# Altium PCB Tracking-Car.PcbDoc
Units mm, origin at the board's own origin, x right, y up, seen from the top; angles counter-clockwise.
Board outline 75 x 96.27 mm, 2 copper layers (Top Layer, Bottom Layer); 50 components, 56 nets, 229 pads, 51 vias.
Unrouted connection lines stored in the file: 183.
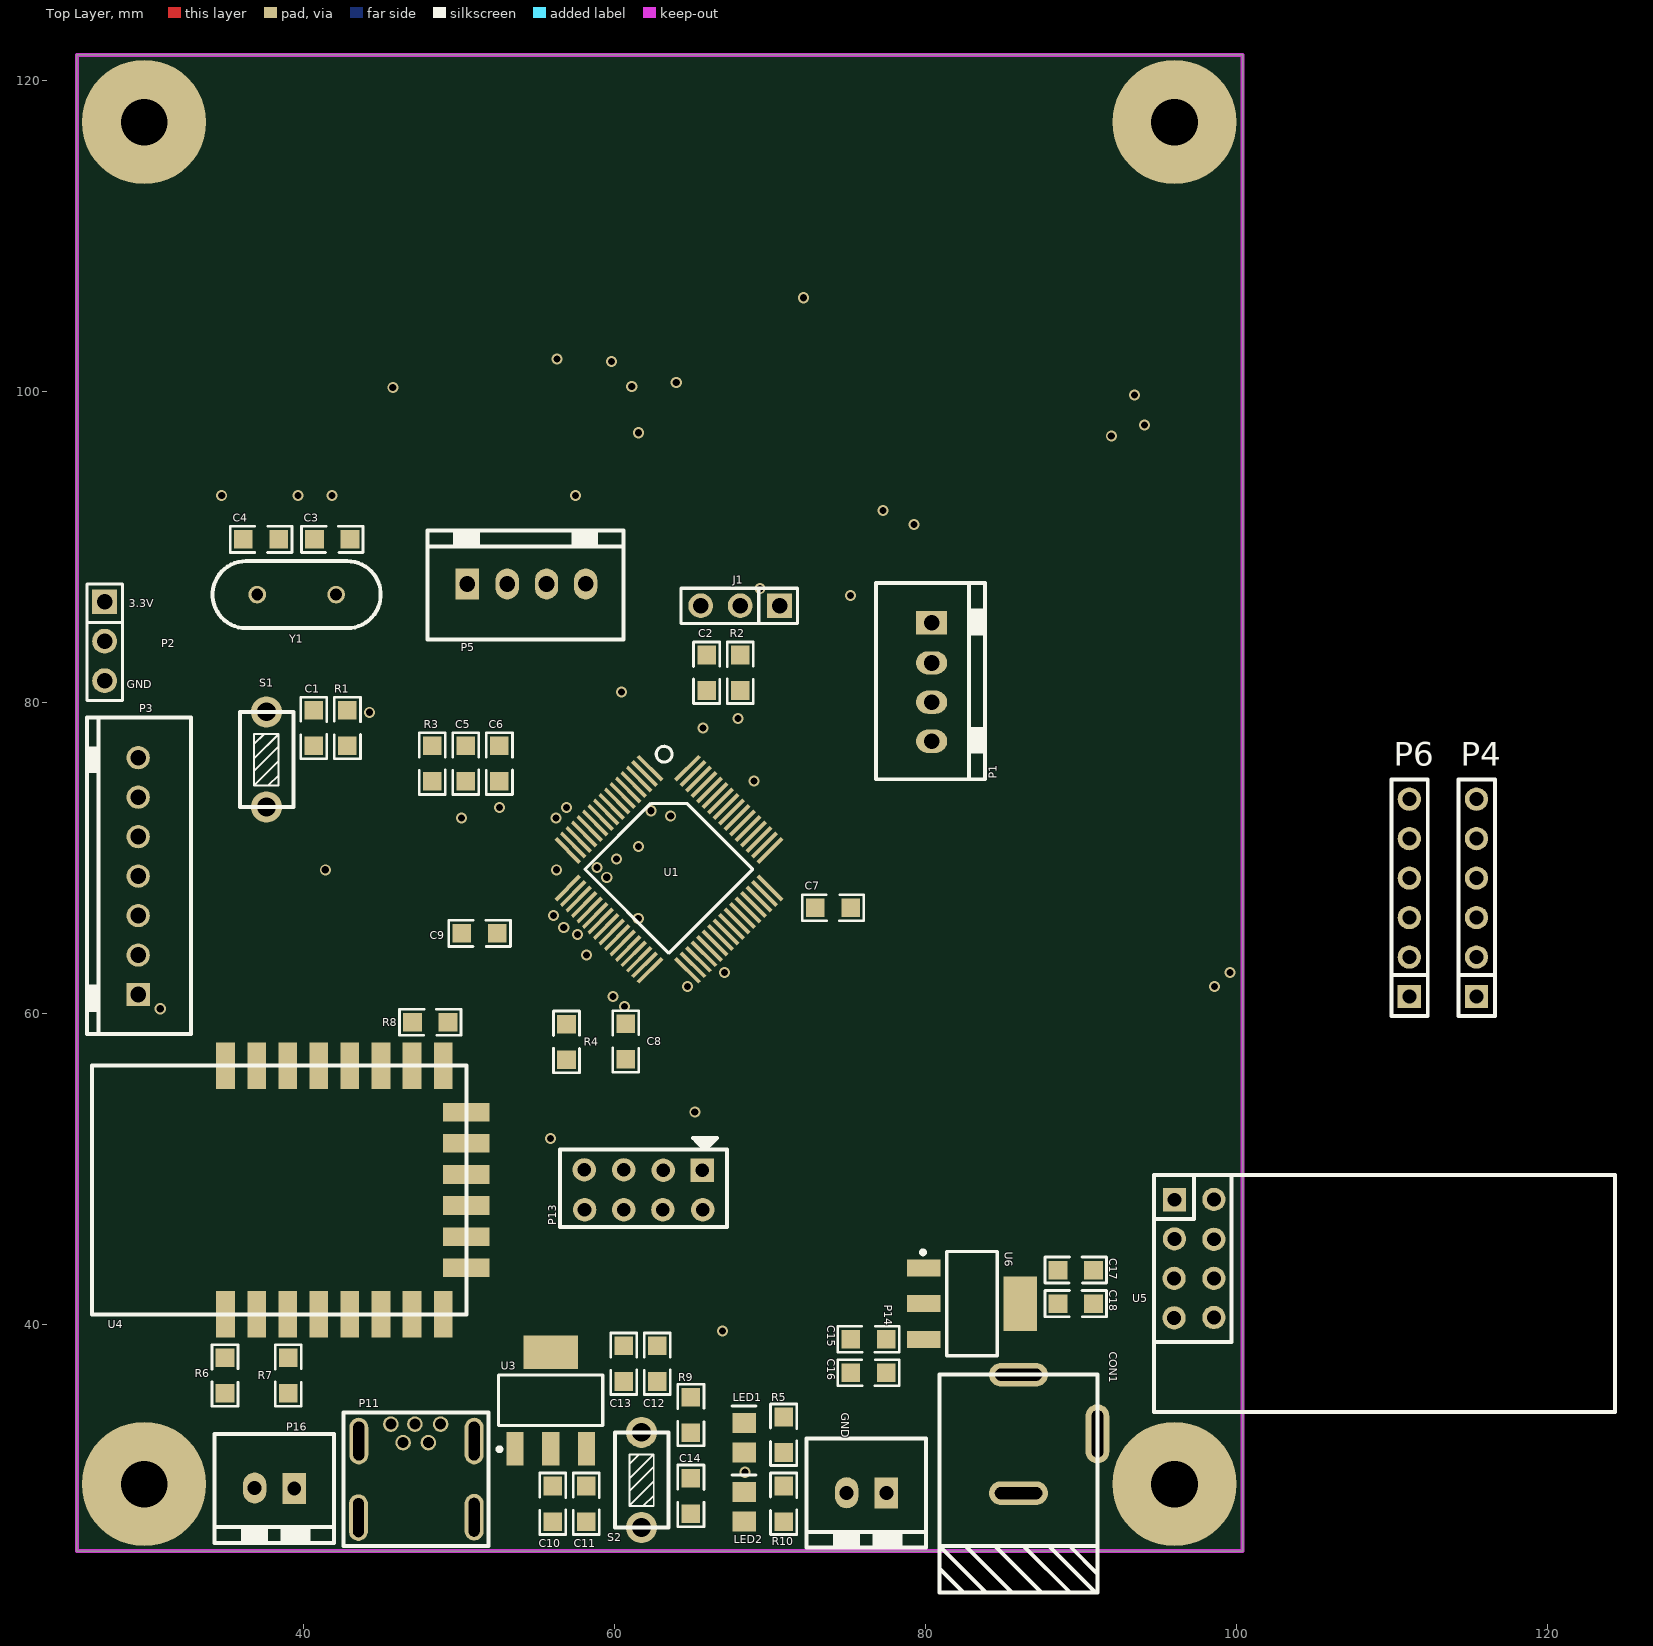
[diagram p0: Top Layer view]
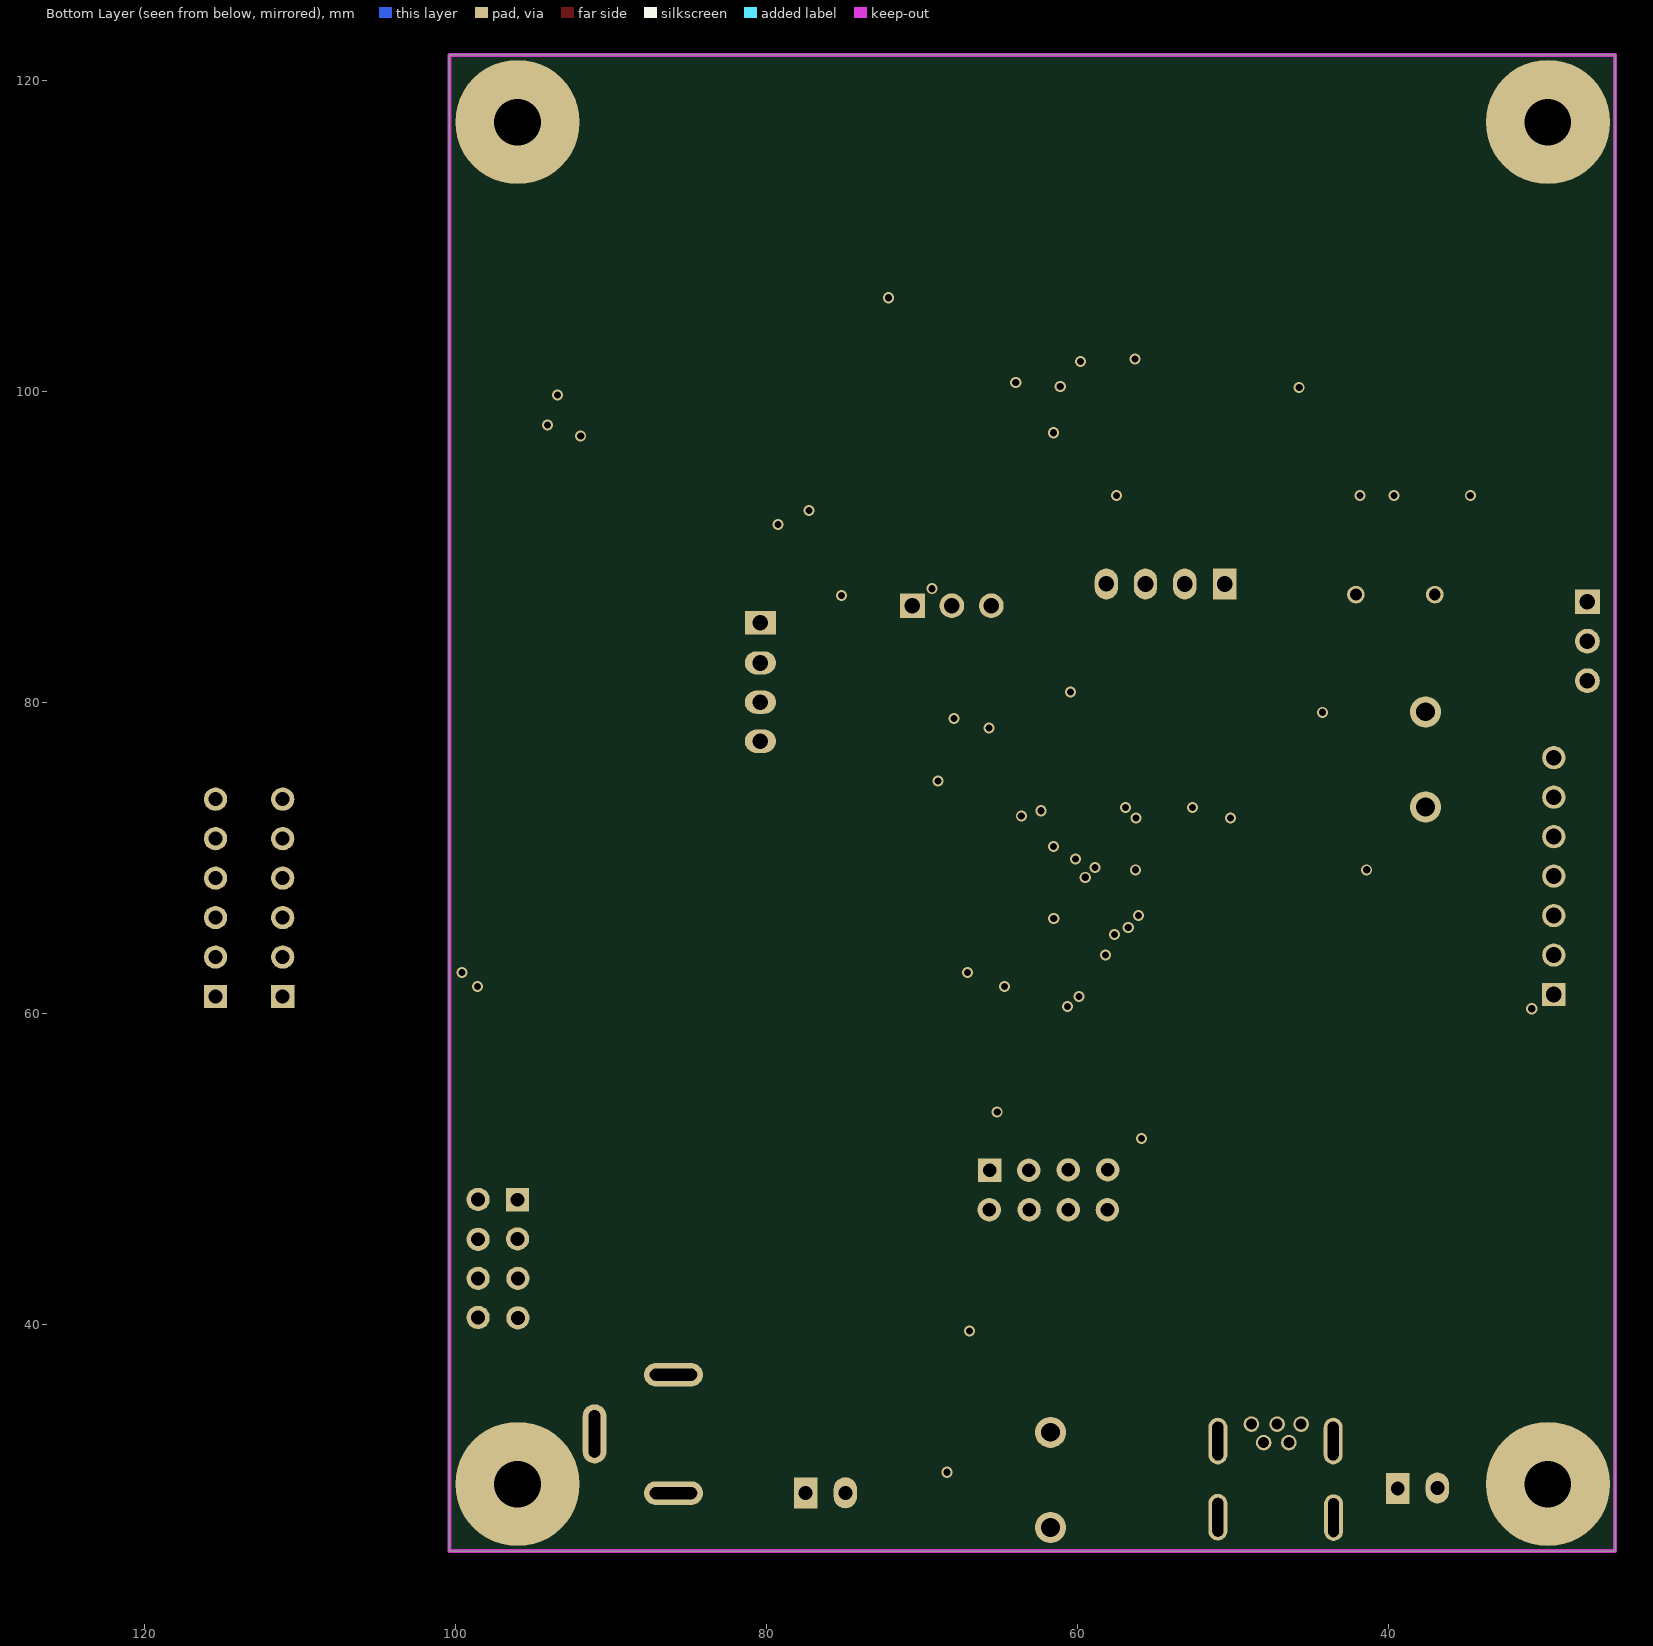
[diagram p1: Bottom Layer view, seen from below]

## Layer stack, top to bottom
Top Solder: solder mask 0.0102, Solder Resist, Dk 3.5
Top Layer: signal copper 0.0356
Dielectric 1: dielectric 0.32, FR-4, Dk 4.8
Bottom Layer: signal copper 0.0356
Bottom Solder: solder mask 0.0102, Solder Resist, Dk 3.5

## Board outline
25.4,25.4 100.4,25.4 100.4,121.666 25.4,121.666

## Design rules (kind name [scope] priority, off if disabled: settings)
AssemblyTestPointUsage [All] p0: scope1count=1 scope1_0_kind=Board scope1_0_value=Board scope2count=1 scope2_0_kind=Board scope2_0_value=Board commentlength=0
AssemblyTestpoint [All] p0: scope1count=1 scope1_0_kind=Board scope1_0_value=Board scope2count=1 scope2_0_kind=Board scope2_0_value=Board commentlength=0
Clearance [All] p0: scope1count=1 scope1_0_kind=Board scope1_0_value=Board scope2count=1 scope2_0_kind=Board scope2_0_value=Board commentlength=0 gap=0.152
Clearance [All] p1: gap=0.152 ignorepadtopadclearanceinfootprint=FALSE
ComponentClearance [All] p0: scope1count=1 scope1_0_kind=Board scope1_0_value=Board scope2count=1 scope2_0_kind=Board scope2_0_value=Board commentlength=0 gap=0.254 collisioncheckmode=3
DiffPairsRouting [All] p0: scope1count=1 scope1_0_kind=Board scope1_0_value=Board scope2count=1 scope2_0_kind=Board scope2_0_value=Board commentlength=0
FabricationTestPointUsage [All] p0: scope1count=1 scope1_0_kind=Board scope1_0_value=Board scope2count=1 scope2_0_kind=Board scope2_0_value=Board commentlength=0 valid=0 allowmultiple=FALSE
FabricationTestpoint [All] p0: scope1count=1 scope1_0_kind=Board scope1_0_value=Board scope2count=1 scope2_0_kind=Board scope2_0_value=Board commentlength=0 side=3 testpointundercomponent=TRUE minsize=1.016 maxsize=2.54 preferedsize=1.524 minholesize=0 maxholesize=1.016 preferedholesize=0.813 testpointgrid=0.025
FanoutControl Fanout_BGA [All] p0 off: scope1count=1 scope1_0_kind=Board scope1_0_value=Board scope2count=1 scope2_0_kind=Board scope2_0_value=Board commentlength=69 // Protel DXP Scope 1 Expression Was: IsBGA   Fanout_BGA (Default Rule)
FanoutControl Fanout_LCC [All] p0 off: scope1count=1 scope1_0_kind=Board scope1_0_value=Board scope2count=1 scope2_0_kind=Board scope2_0_value=Board commentlength=69 // Protel DXP Scope 1 Expression Was: IsLCC   Fanout_LCC (Default Rule)
FanoutControl Fanout_SOIC [All] p0 off: scope1count=1 scope1_0_kind=Board scope1_0_value=Board scope2count=1 scope2_0_kind=Board scope2_0_value=Board commentlength=71 // Protel DXP Scope 1 Expression Was: IsSOIC   Fanout_SOIC (Default Rule)
FanoutControl Fanout_Small [All] p0 off: scope1count=1 scope1_0_kind=Board scope1_0_value=Board scope2count=1 scope2_0_kind=Board scope2_0_value=Board commentlength=84 // Protel DXP Scope 1 Expression Was: (CompPinCount < 5)   Fanout_Small (Default Rule)
FanoutControl Fanout_Default [All] p0: scope1count=1 scope1_0_kind=Board scope1_0_value=Board scope2count=1 scope2_0_kind=Board scope2_0_value=Board commentlength=30 // Fanout_Default (Default Rule)
Height [All] p0: scope1count=1 scope1_0_kind=Board scope1_0_value=Board scope2count=1 scope2_0_kind=Board scope2_0_value=Board commentlength=0
HoleSize [All] p0: scope1count=1 scope1_0_kind=Board scope1_0_value=Board scope2count=1 scope2_0_kind=Board scope2_0_value=Board commentlength=0 absolutevalues=TRUE maxlimit=7.62 minlimit=0.025 maxpercent=80.000 minpercent=20.000
HoleSize [All] p1: absolutevalues=TRUE maxlimit=7.62 minlimit=0.025 maxpercent=80.000 minpercent=20.000
HoleToHoleClearance [All] p0: scope1count=1 scope1_0_kind=Board scope1_0_value=Board scope2count=1 scope2_0_kind=Board scope2_0_value=Board commentlength=0
LayerPairs [All] p0: scope1count=1 scope1_0_kind=Board scope1_0_value=Board scope2count=1 scope2_0_kind=Board scope2_0_value=Board commentlength=0 enforce=TRUE
MinimumSolderMaskSliver [All] p0: scope1count=1 scope1_0_kind=Board scope1_0_value=Board scope2count=1 scope2_0_kind=Board scope2_0_value=Board commentlength=0
NetAntennae [All] p0: scope1count=1 scope1_0_kind=Board scope1_0_value=Board scope2count=1 scope2_0_kind=Board scope2_0_value=Board commentlength=0
PasteMaskExpansion [All] p0: scope1count=1 scope1_0_kind=Board scope1_0_value=Board scope2count=1 scope2_0_kind=Board scope2_0_value=Board commentlength=0 expansion=0
PlaneClearance [All] p0: scope1count=1 scope1_0_kind=Board scope1_0_value=Board scope2count=1 scope2_0_kind=Board scope2_0_value=Board commentlength=0 clearance=0.508
PlaneConnect [All] p0: scope1count=1 scope1_0_kind=Board scope1_0_value=Board scope2count=1 scope2_0_kind=Board scope2_0_value=Board commentlength=0 planeconnectstyle=Relief reliefexpansion=0.508 reliefentries=4 reliefconductorwidth=0.254 reliefairgap=0.254
PolygonConnect [All] p0: scope1count=1 scope1_0_kind=Board scope1_0_value=Board scope2count=1 scope2_0_kind=Board scope2_0_value=Board commentlength=0 connectstyle=Relief reliefconductorwidth=0.254 reliefentries=4 polygonreliefangle="90 Angle"
PolygonConnect [All] p1: connectstyle=Relief reliefconductorwidth=0.254 reliefentries=4 polygonreliefangle="90 Angle" airgapwidth=0.254
RoutingCorners [All] p0: scope1count=1 scope1_0_kind=Board scope1_0_value=Board scope2count=1 scope2_0_kind=Board scope2_0_value=Board commentlength=0 cornerstyle=45-Degree minsetback=2.54 maxsetback=2.54
RoutingLayers [All] p0: scope1count=1 scope1_0_kind=Board scope1_0_value=Board scope2count=1 scope2_0_kind=Board scope2_0_value=Board commentlength=0 top layer=Automatic bottom layer=Automatic
RoutingPriority [All] p0: scope1count=1 scope1_0_kind=Board scope1_0_value=Board scope2count=1 scope2_0_kind=Board scope2_0_value=Board commentlength=0
RoutingTopology [All] p0: scope1count=1 scope1_0_kind=Board scope1_0_value=Board scope2count=1 scope2_0_kind=Board scope2_0_value=Board commentlength=0 topology=Shortest
RoutingVias [All] p0: scope1count=1 scope1_0_kind=Board scope1_0_value=Board scope2count=1 scope2_0_kind=Board scope2_0_value=Board commentlength=0 holewidth=0.457 width=0.711 viastyle="Through Hole" minholewidth=0.457 minwidth=0.711 maxholewidth=0.457 maxwidth=0.711
RoutingVias [All] p1: holewidth=0.457 width=0.711 viastyle="Through Hole" minholewidth=0.457 minwidth=0.711 maxholewidth=0.457 maxwidth=0.711
ShortCircuit [All] p0: scope1count=1 scope1_0_kind=Board scope1_0_value=Board scope2count=1 scope2_0_kind=Board scope2_0_value=Board commentlength=0 allowed=FALSE
SilkToBoardRegionClearance [All] p0: scope1count=1 scope1_0_kind=Board scope1_0_value=Board scope2count=1 scope2_0_kind=Board scope2_0_value=Board commentlength=0
SilkToSilkClearance [All] p0: scope1count=1 scope1_0_kind=Board scope1_0_value=Board scope2count=1 scope2_0_kind=Board scope2_0_value=Board commentlength=0
SilkToSolderMaskClearance [All] p0 off: scope1count=1 scope1_0_kind=Board scope1_0_value=Board scope2count=1 scope2_0_kind=Board scope2_0_value=Board commentlength=44 // Protel DXP Scope 1 Expression Was: IsPad
SolderMaskExpansion [All] p0: scope1count=1 scope1_0_kind=Board scope1_0_value=Board scope2count=1 scope2_0_kind=Board scope2_0_value=Board commentlength=0 expansion=0.102
SolderMaskExpansion [All] p1: expansion=0.102 istentingtop=FALSE
UnRoutedNet [All] p0: scope1count=1 scope1_0_kind=Board scope1_0_value=Board scope2count=1 scope2_0_kind=Board scope2_0_value=Board commentlength=0
UnpouredPolygon [All] p0: scope1count=1 scope1_0_kind=Board scope1_0_value=Board scope2count=1 scope2_0_kind=Board scope2_0_value=Board commentlength=0
Width Width_GND [All] p0: scope1count=1 scope1_0_kind=Net scope1_0_value=GND scope2count=1 scope2_0_kind=Board scope2_0_value=Board commentlength=0 maxlimit=1.016 minlimit=0.254 preferedwidth=0.762
Width Width_12V [All] p0: scope1count=1 scope1_0_kind=Net scope1_0_value=12V scope2count=1 scope2_0_kind=Board scope2_0_value=Board commentlength=0 maxlimit=1.016 minlimit=0.254 preferedwidth=0.762
Width Width_5V [All] p0: scope1count=1 scope1_0_kind=Net scope1_0_value=5V scope2count=1 scope2_0_kind=Board scope2_0_value=Board commentlength=0 maxlimit=1.016 minlimit=0.254 preferedwidth=0.762
Width Width_3.3V [All] p0: scope1count=1 scope1_0_kind=Net scope1_0_value=3.3V scope2count=1 scope2_0_kind=Board scope2_0_value=Board commentlength=0 maxlimit=1.016 minlimit=0.254 preferedwidth=0.762
Width [All] p0: scope1count=1 scope1_0_kind=Board scope1_0_value=Board scope2count=1 scope2_0_kind=Board scope2_0_value=Board commentlength=0 maxlimit=1.016 minlimit=0.254 preferedwidth=0.254
Width Width_5V [InNet('5V')] p1: maxlimit=1.016 minlimit=0.254 preferedwidth=0.762
Width Width_12V [InNet('12V')] p2: maxlimit=1.016 minlimit=0.254 preferedwidth=0.762
Width Width_3.3V [InNet('3.3V')] p3: maxlimit=1.016 minlimit=0.254 preferedwidth=0.762
Width Width_GND [InNet('GND')] p4: maxlimit=1.016 minlimit=0.254 preferedwidth=0.762
Width [All] p5: maxlimit=1.016 minlimit=0.254 preferedwidth=0.254 minimp=50.000000 maximp=50.000000 favimp=50.000000
29 further rules are at their usual default settings.

## Components (designator, comment, footprint, x,y, rotation, side; value= is the part's Value field where it differs from the comment)
C1 "" 0805 40.64,77.216 r90 top
C2 "104" 0805 65.913,83.058 r270 top
C3 "22P" 0805 42.964,90.5 r180 top
C4 "22P" 0805 36.106,90.5 r0 top
C5 "10uF" 0805 50.419,74.93 r90 top
C6 "104" 0805 52.578,74.93 r90 top
C7 "104" 0805 72.898,66.802 r0 top
C8 "104" 0805 60.706,59.334 r270 top
C9 "104" 0805 52.451,65.151 r180 top
C10 "10uF" 0805 56.007,27.305 r90 top
C11 "104" 0805 58.166,27.305 r90 top
C12 "10uF" 0805 62.738,36.322 r90 top
C13 "104" 0805 60.579,36.322 r90 top
C14 "104" 0805 64.897,27.813 r90 top
C15 "10uF" 0805 75.184,39.04 r0 top
C16 "104" 0805 75.184,36.881 r0 top
C17 "10uF" 0805 90.805,43.485 r180 top
C18 "104" 0805 90.805,41.326 r180 top
CON1 "DC POWER" "Power  2.1mm" 85.979,36.754 r90 top
J1 "跳线" "单排插针 2.54 1*3" 70.612,86.233 r180 top
LED1 "红色" LED0805 68.326,31.755 r90 top
LED2 "红色" LED0805 68.326,27.31 r90 top
P1 "XH2.54-4" VH2.54_4 80.391,85.13 r90 top
P2 "XH2.54-3" "单排插针 2.54 1*3" 27.178,86.487 r270 top
P3 "XH2.54-7" VH2.54_7 29.337,61.214 r270 top
P4 "2.54 1*6" "单排插针 2.54 1*6" 115.443,61.087 r90 top
P5 "XH2.54-4" VH2.54_4 50.506,87.63 r180 top
P6 "2.54 1*6" "单排插针 2.54 1*6" 111.125,61.087 r90 top
P11 "USB-MINI座" "USB MINI DIP" 45.593,33.579 r90 top
P13 "双排插针 2.54 2*4" "双排插针 2.54 2*4" 65.659,49.911 r270 top
P14 "XH2.54-2" VH2.54_2 77.47,29.134 r0 top
P16 "XH2.54-2" VH2.54_2 39.38,29.439 r0 top
R1 "10K" 0805 42.799,77.216 r90 top
R2 "100K" 0805 68.072,83.058 r270 top
R3 "10R" 0805 48.26,74.93 r90 top
R4 "100K" 0805 56.896,59.309 r270 top
R5 "300" 0805 70.866,31.75 r90 top
R6 "1K" 0805 34.925,37.846 r270 top
R7 "1K" 0805 38.989,37.846 r270 top
R8 "1K" 0805 49.276,59.436 r180 top
R9 "10K" 0805 64.897,35.306 r270 top
R10 "300" 0805 70.866,27.305 r90 top
S1 "key" "按键 轻触  6*3" 37.592,73.279 r180 top
S2 "key" "按键 轻触  6*3" 61.722,26.924 r180 top
U1 "STM32F103RCT6" LQFP64 62.277,75.781 r315 top
U3 "SPX1117M3-3.3" SOT223 53.569,32.005 r0 top
U4 "模块 WIFI ESP12E" "模块 WIFI ESP12E" 50.457,40.64 r90 top
U5 "nrf24l01" "模块 NRF24L01" 96.012,48.057 r0 top
U6 "SPX1117M3-5.0" SOT223 79.884,43.637 r270 top
Y1 "8M" "晶振 BCY-W2/E4.7" 36.995,86.944 r0 top

## Footprints (in the part's own frame and the unit in brackets; to place one, negate y for a bottom-side part, rotate by r counter-clockwise, add the part's x,y. Pads: shape width x height; smd on the part's side, far side on the other; paste and mask are expansions set on the pad)
0805 [mm]
  rect 1.2x1.2 smd: 1(0,0) 2(2.286,0)
  silkscreen extent -0.84,-0.84 3.12,0.84
LED0805 [mm] "Chip Capacitor; Body 2.0 x 1.2 mm (LxW typ)"
  rect 1.3x1.5 smd: 1(0,0) 2(1.9,0)
  silkscreen extent 2.98,-0.76 2.98,0.76
LQFP64 [mm]
  rect 2.2x0.254 smd: 1(0,0) 2(0,-0.5) 3(0,-1) 4(0,-1.5) 5(0,-2) 6(0,-2.5) 7(0,-3) 8(0,-3.5) 9(0,-4) 10(0,-4.5) 11(0,-5) 12(0,-5.5) 13(0,-6) 14(0,-6.5) 15(0,-7) 16(0,-7.5) 33(10.9,-7.5) 34(10.9,-7) 35(10.9,-6.5) 36(10.9,-6) 37(10.9,-5.5) 38(10.9,-5) 39(10.9,-4.5) 40(10.9,-4) 41(10.9,-3.5) 42(10.9,-3) 43(10.9,-2.5) 44(10.9,-2) 45(10.9,-1.5) 46(10.9,-1) 47(10.9,-0.5) 48(10.9,0)
  rect 0.254x2.2 smd: 17(1.7,-9.2) 18(2.2,-9.2) 19(2.7,-9.2) 20(3.2,-9.2) 21(3.7,-9.2) 22(4.2,-9.2) 23(4.7,-9.2) 24(5.2,-9.2) 25(5.7,-9.2) 26(6.2,-9.2) 27(6.7,-9.2) 28(7.2,-9.2) 29(7.7,-9.2) 30(8.2,-9.2) 31(8.7,-9.2) 32(9.2,-9.2) 49(9.2,1.7) 50(8.7,1.7) 51(8.2,1.7) 52(7.7,1.7) 53(7.2,1.7) 54(6.7,1.7) 55(6.2,1.7) 56(5.7,1.7) 57(5.2,1.7) 58(4.7,1.7) 59(4.2,1.7) 60(3.7,1.7) 61(3.2,1.7) 62(2.7,1.7) 63(2.2,1.7) 64(1.7,1.7)
  silkscreen extent -0.51,-7.56 9.26,1.78
"Power  2.1mm" [mil]
  oval 60x150 hole 30 slot 120 at 90 deg: 1(-300,0) 3(0,0)
  oval 150x60 hole 30 slot 120 at 0 deg: 2(-150,-200)
  silkscreen extent -552,-200 0,200
SOT223 [mm] "SOT-223/SC-73; 4 Leads; Body 6.7 x 7.3 mm, inc. leads (LxW max)"
  rect 1.1x2.15 smd: 1(0.011,-0.001) 2(2.311,-0.001) 3(4.611,-0.001)
  rect 3.5x2.15 smd: 4(2.311,6.199)
  silkscreen extent -1.11,-0.18 5.66,4.72
"USB MINI DIP" [mm]
  round 1 hole 0.7: 1(0,0) 2(-1.194,-0.787) 3(0,-1.549) 4(-1.194,-2.413) 5(0,-3.2)
  oval 3x1.22 hole 0.7 slot 2.5 at 0 deg: 6(-1.093,-5.36) 7(-5.995,-5.36) 8(-1.093,2.057) 9(-6.02,2.082)
  silkscreen extent -7.85,-6.27 0.74,3.05
VH2.54_2 [mm]
  rect 1.5x2 hole 0.9: 1(0,0)
  oval 1.5x2 hole 0.9: 2(-2.55,0.025)
  silkscreen extent -5.14,-3.51 2.56,3.51
VH2.54_4 [mm]
  rect 1.5x2 hole 1.016: 1(0,0)
  oval 1.5x2 hole 1.016: 2(-2.58,0) 3(-5.105,0)
  oval 1.5x2 hole 1: 4(-7.62,0)
  silkscreen extent -10.06,-3.43 2.56,3.58
VH2.54_7 [mm]
  rect 1.5x1.5 hole 1.016: 1(0,0)
  round 1.5 hole 1.016: 2(-2.54,0) 3(-5.08,0) 4(-7.62,0) 5(-10.16,0) 6(-12.7,0) 7(-15.24,0)
  silkscreen extent -17.82,-3.3 2.53,3.4
"单排插针 2.54 1*3" [mm]
  rect 1.6x1.6 hole 1: 1(0,0)
  round 1.6 hole 1: 2(2.54,0) 3(5.08,0)
  silkscreen extent -1.15,-1.12 6.36,1.14
"单排插针 2.54 1*6" [mm]
  rect 1.5x1.5 hole 0.889: 1(0,0)
  round 1.5 hole 0.889: 2(2.54,0) 3(5.08,0) 4(7.62,0) 5(10.16,0) 6(12.7,0)
  silkscreen extent -1.26,-1.18 13.97,1.15
"双排插针 2.54 2*4" [mm]
  rect 1.5x1.5 hole 0.889: 1(0,-0.025)
  round 1.5 hole 0.889: 2(2.54,0) 3(0,-2.54) 4(2.54,-2.565) 5(-0.025,-5.08) 6(2.54,-5.08) 7(-0.025,-7.62) 8(2.54,-7.595)
  silkscreen extent -2.08,-9.17 3.66,1.57
"按键 轻触  6*3" [mm]
  round 2 hole 1.2: 1(0,0) 2(0,-6.121)
  silkscreen extent -1.73,-6.12 1.7,0
"晶振 BCY-W2/E4.7" [mil] "Quartz Crystal, Thru-Hole; 2 Leads; Body 11.35 x 4.65 x 13.46 mm (LxWxH max)"
  round 45 hole 30: 1(0,0) 2(200,0)
  silkscreen extent -113,-85 313,85
"模块 NRF24L01" [mil]
  rect 59.06x59.06 hole 35: 1(0,-2)
  round 59.06 hole 35: 2(100,-1) 3(0,-101) 4(100,-102) 5(-1,-201) 6(100,-201) 7(-1,-301) 8(100,-300)
  silkscreen extent -52,-539 1116,61
"模块 WIFI ESP12E" [mm]
  rect 3x1.2 smd: 1(0,15.5) 2(0,13.5) 3(0,11.5) 4(0,9.5) 5(0,7.5) 6(0,5.5) 7(0,3.5) 8(0,1.5) 15(16.002,1.5) 16(16.002,3.5) 17(16.002,5.5) 18(16,7.5) 19(16.002,9.5) 20(16.002,11.5) 21(16.002,13.5) 22(16.002,15.5)
  rect 1.2x3 smd: 9(3,0) 10(5,0) 11(7,0) 12(9,0) 13(11,0) 14(13,0)
  silkscreen extent 0,0 16,24.08

## Part data
C1 C2 C3 C4 C5 C6 C7 C8 C9 C10 C11 C12 C13 C14 C15 C16 C17 C18: library part "电容 贴片 0805"
CON1: library part "连接件 电源座"
J1: library part "联结件 跳线端子 2.54-3"
LED1 LED2: library part "二极管 贴片发光 0805"
P1 P5: library part "联结件 XH2.54-4"
P2: library part "连接件 XH2.54-3"
P3: library part "连接件 XH2.54-7"
P4 P6: library part "连接件 单排插针 2.54 1*6"
P11: library part "联结件 USB-MINI座"
P13: library part "联结件 双排插针 2.54 2*4"
P14 P16: library part "联结件 XH2.54-2"
R1 R2 R3 R4 R5 R6 R7 R8 R9 R10: library part "电阻 贴片 0805"
S1 S2: library part "按键 轻触 3*6"
U1: library part "贴片芯片 STM32F103RCT6", "单片机"
U3: library part "贴片芯片 SPX1117M3-3.3", "LDO"
U5: library part "模块 NRF24L01"
U6: library part "贴片芯片 SPX1117M3-5.0", "LDO"
Y1: library part "晶振 直插矮"

## Free pads (board coordinates)
  round 8 hole 3: 1(29.718,29.718) 2(96.012,29.718) 3(96.012,117.348) 4(29.718,117.348)

## Via types
v1: diameter 0.711, hole 0.457, Top Layer to Bottom Layer, 51 vias

## Nets (pads, with @x,y where several pads share a name; then routed paths per layer and width w, separated by ;. In a path a pad name is that pad's centre, name@x,y a point inside that pad or via, vN(x,y) a via of type N, cw(c..) or ccw(c..) an arc to the next point about the centre after c; other vN are vias at no path point)
3.3V: C2.2 C7.1 C8.1 C9.1 C12.2 C13.2 J1.3 P1.1 P2.1 P13.1 P13.3 R1.1 R3.2 R5.2 R6.2 R7.2 R9.1 U1.1 U1.19 U1.32 U1.48 U1.64 U3.2 U3.4 U4.8 U5.2
  other v1: 55.855,51.943
5V: C10.2 C11.2 C17.2 C18.2 P3.6 P5.1 P11.1 P13.5 P13.7 P16.1 R10.2 U3.3 U6.2 U6.4
  other v1: 68.377,30.48
12V: C15.2 C16.2 CON1.1 P14.1 U6.3
Avoid_Echo: P5.3 U1.58
  other v1: 67.92,78.968
Avoid_Motor: P2.2 U1.23
  other v1: 60.122,69.926
Avoid_Trig: P5.2 U1.59
  other v1: 65.684,78.358
BOOT0: R2.2 U1.60
BOOT1: R4.1 U1.28
GND: C1.1 C2.1 C3.1 C4.1 C5.2 C6.2 C7.2 C8.2 C9.2 C10.1 C11.1 C12.1 C13.1 C14.1 C15.1 C16.1 C17.1 C18.1 CON1.2 CON1.3 J1.1 LED1.2 LED2.2 P1.4 P2.3 P3.7 P5.4 P11.6 P11.8 P11.9 P13.2 P13.4 P13.6 P13.8 P14.2 P16.2 R4.2 R8.1 S1.1 S2.1 U1.12 U1.18 U1.31 U1.47 U1.63 U3.1 U4.15 U5.1 U6.1
  other v1: 61.519,97.358
Motor_LF_1: P4.2 U1.26
  other v1: 61.512,66.116 77.267,92.354
Motor_LF_2: P4.3 U1.27
  other v1: 58.177,63.754 79.248,91.465
Motor_LF_PWM: P4.1 U1.55
  other v1: 63.957,100.584
Motor_LR_1: P6.2 U1.62
  other v1: 63.602,72.695 44.221,79.375
Motor_LR_2: P6.3 U1.8
  other v1: 59.792,101.956
Motor_LR_PWM: P6.1 U1.9
Motor_RF_1: P4.4 U1.56
  other v1: 75.159,86.893
Motor_RF_2: P4.5 U1.57
  other v1: 68.961,74.955
Motor_RF_PWM: P4.6 U1.61
  other v1: 61.093,100.33
Motor_RR_1: P6.4 U1.10
  other v1: 45.72,100.279
Motor_RR_2: P6.5 U1.11
Motor_RR_PWM: P6.6 U1.24
NetC3_2: C3.2 U1.5 Y1.2
  other v1: 62.321,73.04
NetC4_2: C4.2 U1.6 Y1.1
  other v1: 60.433,80.689
NetC5_1: C5.1 C6.1 R3.1 U1.13
  other v1: 52.578,73.254 56.896,73.254
NetJ1_2: J1.2 R2.1
NetLED1_1: LED1.1 R5.1
NetLED2_1: LED2.1 R10.1
NetP11_5: P11.5 P11.7
NetR6_1: R6.1 U4.1
NetR7_1: R7.1 U4.3
NetR8_2: R8.2 U4.16
NRF24L01_CE: U1.29 U5.3
  other v1: 60.63,60.452
NRF24L01_IRQ: U1.30 U5.8
  other v1: 59.893,61.087
NRF24L01_MISO: U1.35 U5.7
  other v1: 66.929,39.573
NRF24L01_MOSI: U1.36 U5.6
  other v1: 67.068,62.636 99.593,62.636
NRF24L01_NSS: U1.33 U5.4
  other v1: 64.681,61.722 98.577,61.722
NRF24L01_SCK: U1.34 U5.5
  other v1: 65.151,53.645
PC8: U1.39
PC9: U1.40
PC10: U1.51
PC11: U1.52
PC12: U1.53
PC13: U1.2
PC14: U1.3
PC15: U1.4
RST: C1.2 R1.2 S1.2 U1.7
  other v1: 61.54,70.743
SWCLK: P1.3 U1.49
  other v1: 69.342,87.325
SWDIO: P1.2 U1.46
Switch_Key: C14.2 R9.2 S2.2 U1.25
Tracking_L1: P3.5 U1.14
  other v1: 58.852,69.393
Tracking_L2: P3.4 U1.15
  other v1: 59.487,68.758
Tracking_Mi: P3.3 U1.20
  other v1: 56.054,66.294
Tracking_R1: P3.1 U1.22
  other v1: 57.607,65.075
Tracking_R2: P3.2 U1.21
  other v1: 56.718,65.532
U2_RX: U1.17 U4.22
  other v1: 41.377,69.24 56.261,69.24
U2_TX: U1.16 U4.21
  other v1: 50.14,72.568 56.21,72.568
pads on no net: P11.2 P11.3 P11.4 U1.37 U1.38 U1.41 U1.42 U1.43 U1.44 U1.45 U1.50 U1.54 U4.2 U4.4 U4.5 U4.6 U4.7 U4.9 U4.10 U4.11 U4.12 U4.13 U4.14 U4.17 U4.18 U4.19 U4.20
copper on no net:
  other v1: 30.759,60.3 34.712,93.32 39.624,93.32 41.808,93.32 57.48,93.32 91.948,97.155 94.082,97.866 93.447,99.797 56.286,102.108 72.136,106.045

## Keep-outs
Keep-Out Layer:
  the board outline again, w0.254

## Silkscreen, mask and mechanical layers (free items; w line width, h text height)
Top Overlay:
  text "3.3V" at 28.727,86.131 h0.51
  text "GND" at 28.6,80.924 h0.51
  text "GND" at 74.574,34.315 h0.51 r270

## Text inside footprints (layer, text, board x,y; h text height)
C1: Keep-Out Layer "104" at 41.236,74.511 h0.51